# Altium PCB MainBay_v2.2_PCB.PcbDoc
Units mm, origin at the board's own origin, x right, y up, seen from the top; angles counter-clockwise.
Board outline 70 x 130 mm, 2 copper layers (Top Layer, Bottom Layer); 55 components, 47 nets, 322 pads, 51 vias.
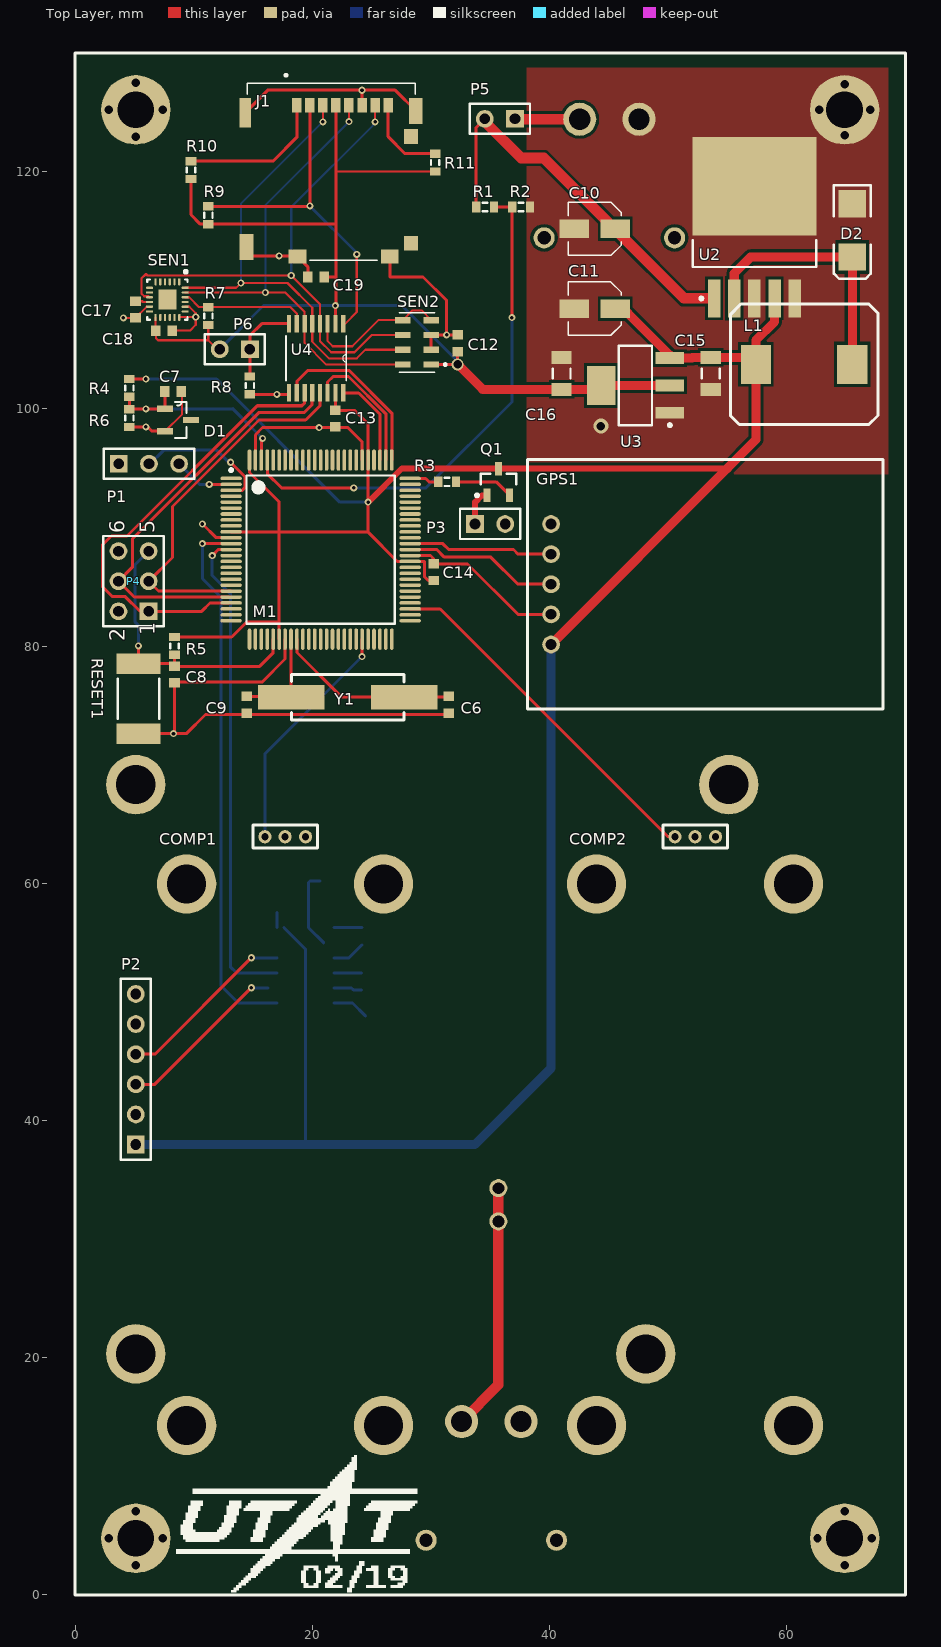
[diagram p0: Top Layer view]
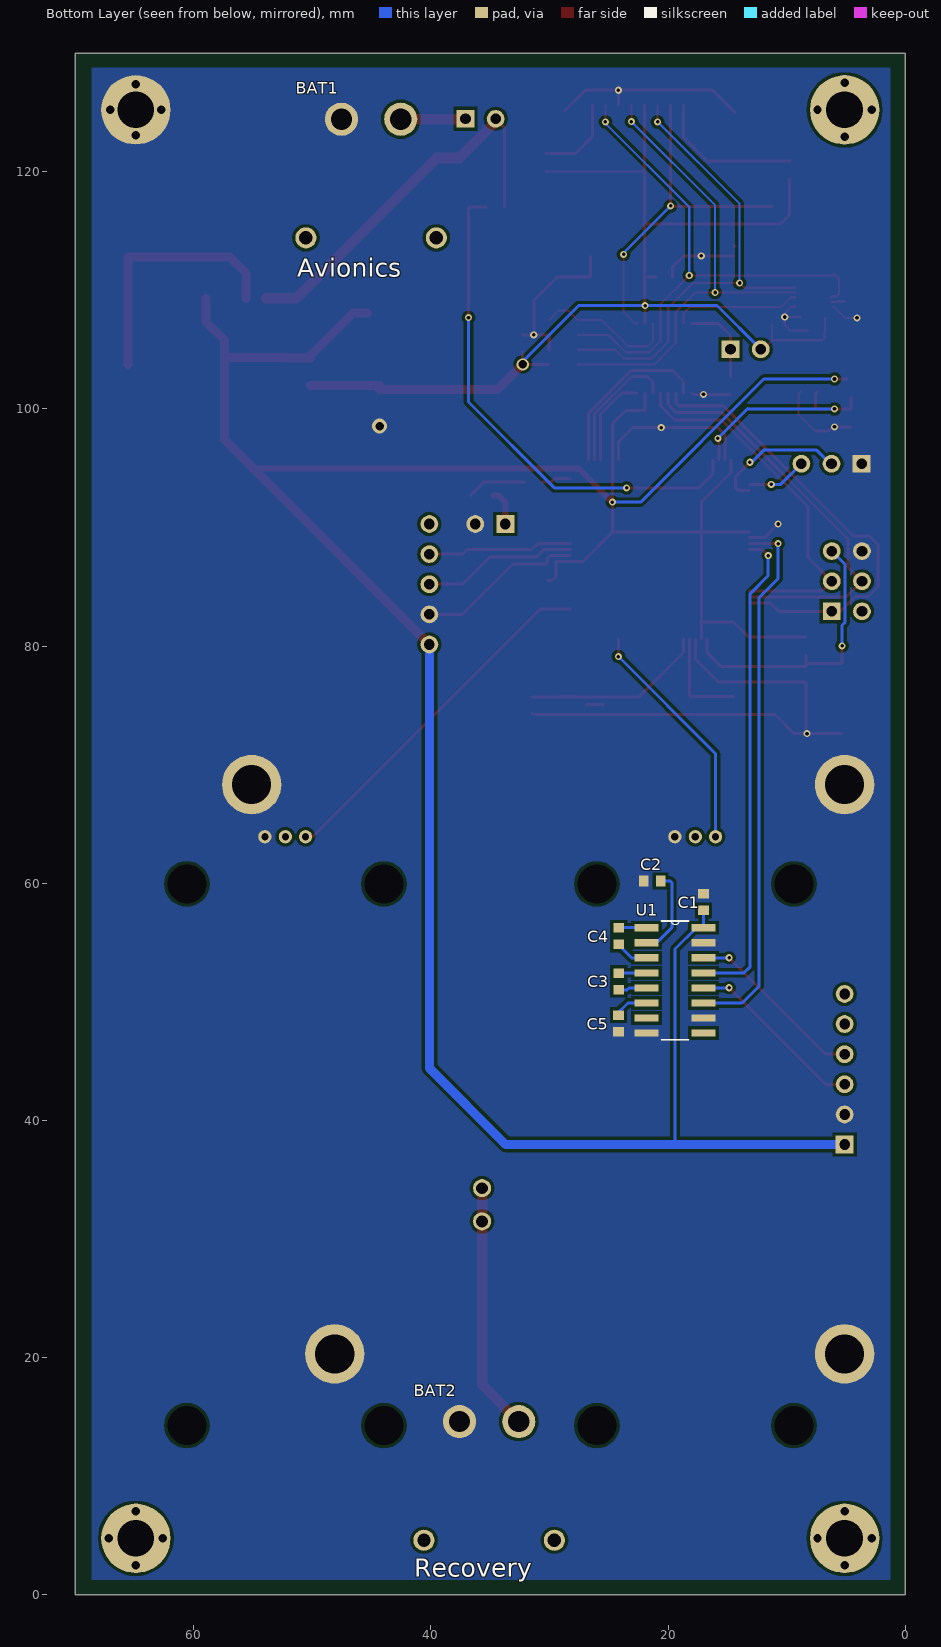
[diagram p1: Bottom Layer view, seen from below]

## Layer stack, top to bottom
Top Solder: solder mask 0.0102, Solder Resist, Dk 3.5
Top Layer: signal copper 0.0356
Dielectric 1: dielectric 0.32, FR-4, Dk 4.8
Bottom Layer: signal copper 0.0356
Bottom Solder: solder mask 0.0102, Solder Resist, Dk 3.5

## Board outline
0,0 0,130 70,130 70,0

## Design rules (kind name [scope] priority, off if disabled: settings)
Clearance [All] p1: gap=0.254 ignorepadtopadclearanceinfootprint=TRUE except(0: Arc-Hole Track-Hole SMDPad-Hole THPad-Hole Via-Hole Fill-Hole Poly-Hole Region-Hole Text-Hole; 0.127: Arc-Arc Arc-Track Arc-SMDPad Arc-Via Track-Track Track-SMDPad Track-Via SMDPad-SMDPad SMDPad-Via)
PlaneConnect [All] p1: planeconnectstyle=Direct reliefexpansion=0.508 reliefentries=4 reliefconductorwidth=0.254 reliefairgap=0.254
PolygonConnect [All] p1: connectstyle=Direct reliefconductorwidth=0.254 reliefentries=4 polygonreliefangle="90 Angle" airgapwidth=0.254
RoutingVias [All] p1: holewidth=0.3 width=0.6 viastyle="Through Hole" minholewidth=0.3 minwidth=0.6 maxholewidth=0.711 maxwidth=1.27
SolderMaskExpansion [All] p1: expansion=0.102
Width NetD2_2 [InNet('NetD2_2')] p1: maxlimit=0.762 minlimit=0.254 preferedwidth=0.762 minimp=50.000000 maximp=50.000000 favimp=50.000000
Width Battery [InNet('NetBAT1_1')] p2: maxlimit=1.016 minlimit=0.254 preferedwidth=0.889 bottomlayer_maxwidth=0.254 bottomlayer_prefwidth=0.254 minimp=50.000000 maximp=50.000000 favimp=50.000000
Width VREC [InNet('VREC')] p3: maxlimit=0.889 minlimit=0.508 preferedwidth=0.889 minimp=50.000000 maximp=50.000000 favimp=50.000000
Width Test [InNet('NetSEN1_24')] p4: maxlimit=0.254 minlimit=0.127 preferedwidth=0.178 minimp=50.000000 maximp=50.000000 favimp=50.000000
Width Diode [InNet('NetD1_2')] p5: maxlimit=0.889 minlimit=0.635 preferedwidth=0.762 minimp=50.000000 maximp=50.000000 favimp=50.000000
Width 3.3VDC [InNet('+3.3VDC')] p6: maxlimit=0.889 minlimit=0.178 preferedwidth=0.762 minimp=50.000000 maximp=50.000000 favimp=50.000000
Width 5VDC [InNet('+5VDC')] p7: maxlimit=0.889 minlimit=0.178 preferedwidth=0.762 minimp=50.000000 maximp=50.000000 favimp=50.000000
Width VBAT [InNet('VBAT')] p8: maxlimit=1.27 minlimit=0.254 preferedwidth=1.143 bottomlayer_minwidth=0.889 minimp=50.000000 maximp=50.000000 favimp=50.000000 // Battery trace width
Width [All] p9: maxlimit=0.508 minlimit=0.178 preferedwidth=0.254 minimp=50.000000 maximp=50.000000 favimp=50.000000
29 further rules are at their usual default settings.

## Classes and differential pairs
component class Sensors: C17 C18 C19 IMU J1 P6 PRES R7 R8 R9 R10 R11 SEN1 SEN2 U4
component class PowerSys: BAT1 BAT2 C10 C11 C12 C13 C14 C15 C16 D2 L1 P5 U2 U3
component class Microcontroller: C1 C2 C3 C4 C5 C6 C7 C8 C9 COMP1 COMP2 D1 GPS1 M1 P1 P2 P3 P4 Q1 R1 R2 R3 R4 R5 R6 RESET1 U1 Y1

## Components (designator, comment, footprint, x,y, rotation, side; value= is the part's Value field where it differs from the comment)
BAT1 "Avionics" XT30 42.546,124.427 r0 bottom
BAT2 "Recovery" XT30 32.592,14.605 r0 bottom
C1 "Cap Semi" 1608[0603] 17.018,58.415 r90 bottom value=1uF
C2 "Cap Semi" 1608[0603] 21.336,60.193 r0 bottom value=1uF
C3 "Cap Semi" 1608[0603] 24.168,51.735 r270 bottom value=1uF
C4 "Cap Semi" 1608[0603] 24.168,55.54 r270 bottom value=1uF
C5 "Cap Semi" 1608[0603] 24.188,48.174 r270 bottom value=1uF
C6 "Cap Semi" 1608[0603] 31.496,75.057 r90 top value=22pF
C7 "Cap Semi" 1608[0603] 8.256,101.473 r180 top value=0.1uF
C8 "Cap Semi" 1608[0603] 8.382,77.597 r90 top value=0.1uF
C9 "Cap Semi" 1608[0603] 14.478,75.057 r90 top value=22pF
C10 "Cap2" *CAPAE430X550N 43.815,115.189 r180 top value=680uF
C11 "Cap2" *CAPAE430X550N 43.815,108.458 r180 top value=10uF
C12 "Cap Semi" 1608[0603] 32.258,105.537 r270 top value=1uF
C13 "Cap Semi" 1608[0603] 21.946,99.187 r90 top value=1uF
C14 "Cap Semi" 1608[0603] 30.226,86.233 r270 top value=1uF
C15 "Cap Semi" C1206 53.594,102.997 r90 top value=1uF
C16 "Cap Semi" C1206 41.021,102.997 r270 top value=100pF
C17 "Cap Semi" 1608[0603] 5.088,108.382 r90 top value=1uF
C18 "Cap Semi" 1608[0603] 7.501,106.604 r180 top value=0.1uF
C19 "Cap Semi" 1608[0603] 20.32,111.125 r0 top value=0.1uF
COMP1 "StratoLogger_Standoff" StratoLogger_S 9.398,59.944 r270 top
COMP2 "StratoLogger_Standoff" StratoLogger_S 43.969,59.944 r270 top
D1 "LM4040A82IDBZR" SOT95P237X112-3N 8.671,99.06 r0 top
D2 "D Schottky" SMB 65.532,115.062 r270 top
GPS1 "Neo 6M GPS" "Neo 6M GPS" 40.132,80.137 r90 top
J1 "503182-1852" MOLEX_503182-1852_503182-1852(Primary) 21.59,119.253 r0 top
L1 "33uH" Inductor 61.468,103.759 r0 top
M1 "ATmega2560-16AU" 100A_N 20.701,88.138 r0 top
P1 "Header 3" HDR1X3 3.683,95.377 r0 top
P2 "Radio" HDR1X6 5.115,37.97 r90 top
P3 "Header 2" HDR1X2 33.721,90.297 r0 top
P4 "Header 3X2" HDR2X3 6.195,82.931 r90 top
P5 "RBF Switch Connector" HDR1X2 37.084,124.46 r180 top
P6 "Header 2" HDR1X2 14.732,105.029 r180 top
Q1 "PNP" SOT-23B_N 35.687,93.841 r90 top
R1 "Res3" J1-0603 34.563,117.022 r180 top value=20K
R2 "Res3" J1-0603 37.611,117.022 r180 top value=10K
R3 "Res3" J1-0603 31.369,93.853 r180 top value=10K
R4 "Res3" J1-0603 4.572,101.774 r90 top value=750
R5 "Res3" J1-0603 8.382,80.01 r270 top value=10K
R6 "Res3" J1-0603 4.572,99.234 r90 top value=10K
R7 "Res3" J1-0603 11.227,107.823 r90 top value=10K
R8 "Res3" J1-0603 14.732,101.981 r270 top value=100K
R9 "Res3" J1-0603 11.227,116.332 r90 top value=100K
R10 "Res3" J1-0603 9.763,120.142 r270 top value=10K
R11 "Res3" J1-0603 30.353,120.777 r270 top value=100K
RESET1 "KSS221GLFS" KSS-2G 5.334,75.565 r270 top
SEN1 "MPU-9250" QFN40P300X300X105_HS-25L 7.779,109.217 r270 top
SEN2 "MS561101" SON125P500X300X100-8N 28.829,105.613 r180 top
U1 "MAX232DR" SOIC127P600X175-16N 17.018,47.366 r180 bottom
U2 "LM2592HVS-5.0/NOPB" TS5B_N 57.277,115.316 r90 top
U3 "LD1117S33TR" SOT-223_N 47.244,101.981 r180 top
U4 "TXB0106" SOP65P640X120-16N 20.32,104.267 r270 top
Y1 "Crystal SMD" "Crystal SMD" 22.987,75.692 r180 top

## Footprints (in the part's own frame and the unit in brackets; to place one, negate y for a bottom-side part, rotate by r counter-clockwise, add the part's x,y. Pads: shape width x height; smd on the part's side, far side on the other; paste and mask are expansions set on the pad)
100A_N [mm] "Thin QFP, 100-Leads, Body 14x14mm, Pitch 0.5mm, IPC Medium Density"
  oval 1.8x0.3 smd: 1(-7.55,6) 2(-7.55,5.5) 3(-7.55,5) 4(-7.55,4.5) 5(-7.55,4) 6(-7.55,3.5) 7(-7.55,3) 8(-7.55,2.5) 9(-7.55,2) 10(-7.55,1.5) 11(-7.55,1) 12(-7.55,0.5) 13(-7.55,0) 14(-7.55,-0.5) 15(-7.55,-1) 16(-7.55,-1.5) 17(-7.55,-2) 18(-7.55,-2.5) 19(-7.55,-3) 20(-7.55,-3.5) 21(-7.55,-4) 22(-7.55,-4.5) 23(-7.55,-5) 24(-7.55,-5.5) 25(-7.55,-6) 51(7.55,-6) 52(7.55,-5.5) 53(7.55,-5) 54(7.55,-4.5) 55(7.55,-4) 56(7.55,-3.5) 57(7.55,-3) 58(7.55,-2.5) 59(7.55,-2) 60(7.55,-1.5) 61(7.55,-1) 62(7.55,-0.5) 63(7.55,0) 64(7.55,0.5) 65(7.55,1) 66(7.55,1.5) 67(7.55,2) 68(7.55,2.5) 69(7.55,3) 70(7.55,3.5) 71(7.55,4) 72(7.55,4.5) 73(7.55,5) 74(7.55,5.5) 75(7.55,6)
  oval 0.3x1.8 smd: 26(-6,-7.55) 27(-5.5,-7.55) 28(-5,-7.55) 29(-4.5,-7.55) 30(-4,-7.55) 31(-3.5,-7.55) 32(-3,-7.55) 33(-2.5,-7.55) 34(-2,-7.55) 35(-1.5,-7.55) 36(-1,-7.55) 37(-0.5,-7.55) 38(0,-7.55) 39(0.5,-7.55) 40(1,-7.55) 41(1.5,-7.55) 42(2,-7.55) 43(2.5,-7.55) 44(3,-7.55) 45(3.5,-7.55) 46(4,-7.55) 47(4.5,-7.55) 48(5,-7.55) 49(5.5,-7.55) 50(6,-7.55) 76(6,7.55) 77(5.5,7.55) 78(5,7.55) 79(4.5,7.55) 80(4,7.55) 81(3.5,7.55) 82(3,7.55) 83(2.5,7.55) 84(2,7.55) 85(1.5,7.55) 86(1,7.55) 87(0.5,7.55) 88(0,7.55) 89(-0.5,7.55) 90(-1,7.55) 91(-1.5,7.55) 92(-2,7.55) 93(-2.5,7.55) 94(-3,7.55) 95(-3.5,7.55) 96(-4,7.55) 97(-4.5,7.55) 98(-5,7.55) 99(-5.5,7.55) 100(-6,7.55)
  silkscreen extent -7.67,-6.25 6.25,6.82, body extent -7,-7 7,7, height 1.2
1608[0603] [mm] "Chip Capacitor, Body 1.6x0.8mm, IPC High Density"
  rect 0.8x0.9 smd: 1(-0.7,0) 2(0.7,0)
  body extent -0.87,-0.48 0.87,0.48, height 1.3
*CAPAE430X550N [mm]
  rect 2.46x1.58 smd: 1(-1.725,0) 2(1.725,0)
  silkscreen extent -2.25,-2.25 2.25,2.25
C1206 [mm] "Chip Capacitor, Body 3.2x1.6mm, IPC High Density"
  rect 1.1x1.7 smd: 1(-1.35,0) 2(1.35,0)
  silkscreen extent -0.4,-0.75 0.4,0.75, body extent -1.7,-0.9 1.7,0.9, height 1.3
"Crystal SMD" [mil]
  rect 220x80 smd: 1(-187.5,0) 2(187.5,0)
  silkscreen extent -188,-75 188,75
HDR1X2 [mm] "Connector; Header; 2 Position"
  rect 1.5x1.5 hole 0.9: 1(0,0)
  round 1.5 hole 0.9: 2(2.54,0)
  silkscreen extent -1.27,-1.27 3.81,1.27
HDR1X3 [mm] "Connector; Header; 3 Position"
  rect 1.5x1.5 hole 0.9: 1(0,0)
  round 1.5 hole 0.9: 2(2.54,0) 3(5.08,0)
  silkscreen extent -1.27,-1.27 6.35,1.27
HDR1X6 [mm] "Connector; Header; 6 Position"
  rect 1.5x1.5 hole 0.9: 1(0,0)
  round 1.5 hole 0.9: 2(2.54,0) 3(5.08,0) 4(7.62,0) 5(10.16,0) 6(12.7,0)
  silkscreen extent -1.27,-1.27 13.97,1.27
HDR2X3 [mm] "Connector; Header; 3x2 Position"
  rect 1.5x1.5 hole 0.9: 1(0,0)
  round 1.5 hole 0.9: 2(0,2.54) 3(2.54,0) 4(2.54,2.54) 5(5.08,0) 6(5.08,2.54)
  silkscreen extent -1.27,-1.27 6.35,3.81
Inductor [mil]
  rect 100x130 smd: 1(-160,0) 2(160,0)
  silkscreen extent -245,-200 245,200
J1-0603 [mm] "Chip Resistor, Body 1.6x0.8mm, IPC High Density"
  rect 0.7x0.9 smd: 1(-0.75,0) 2(0.75,0)
  silkscreen extent -0.2,-0.35 0.2,0.35, body extent -0.85,-0.48 0.85,0.48, height 0.9
KSS-2G [mm] "Switch, Side Tact, SM; 2 Leads; Body 7x3.5mm (LxW)"
  rect 1.7x3.7 smd: 1(2.95,0) 2(-2.95,0)
  silkscreen extent -1.7,-1.75 1.7,1.75, body extent -2.75,-2.65 2.75,1.75, height 1.75
MOLEX_503182-1852_503182-1852(Primary) [mm]
  rect 0.8x1.24 smd: 1(-2.9,6.355) 2(-1.8,6.355) 3(-0.7,6.355) 4(0.4,6.355) 5(1.5,6.355) 6(2.6,6.355) 7(3.7,6.355) 8(4.8,6.355)
  rect 1.16x1.2 smd: DT(6.74,-5.275)
  rect 0.95x2.5 smd: P1(-7.245,5.725)
  rect 1.15x2.2 smd: P2(7.145,5.875) P3(-7.145,-5.605)
  rect 1.5x1.15 smd: P4(-2.84,-6.4) P5(4.94,-6.4)
  rect 1.16x1.25 smd: SW(6.74,3.725)
  silkscreen extent -7.07,-6.73 7.07,8.99
"Neo 6M GPS" [mm]
  round 1.5 hole 0.9: 1(0,0) 2(2.54,0) 3(5.08,0) 4(7.62,0) 5(10.16,0)
  silkscreen extent -5.42,-28 15.58,2
QFN40P300X300X105_HS-25L [mm] "QFN, 24-Leads, Body 3.00x3.00mm, Pitch 0.40mm, Thermal Pad 1.70x1.54mm, IPC High Density"
  oval 0.6x0.2 smd: 1(-1.5,1) 2(-1.5,0.6) 3(-1.5,0.2) 4(-1.5,-0.2) 5(-1.5,-0.6) 6(-1.5,-1) 13(1.5,-1) 14(1.5,-0.6) 15(1.5,-0.2) 16(1.5,0.2) 17(1.5,0.6) 18(1.5,1)
  oval 0.2x0.6 smd: 7(-1,-1.5) 8(-0.6,-1.5) 9(-0.2,-1.5) 10(0.2,-1.5) 11(0.6,-1.5) 12(1,-1.5) 19(1,1.5) 20(0.6,1.5) 21(0.2,1.5) 22(-0.2,1.5) 23(-0.6,1.5) 24(-1,1.5)
  rect 1.7x1.54 smd: 25(0,0)
  silkscreen extent -2.47,-1.7 1.7,1.7, body extent -1.55,-1.55 1.55,1.55, height 1.05
SMB [mm] "DO-214-AA/SMB; 2 C-Bend Leads; Body 5.3 x 3.6 mm, inc. leads (LxW)"
  rect 2.3x2.3 smd: 1(-2.25,0) 2(2.25,0)
  silkscreen extent -3.8,-1.55 4.1,1.55
SOIC127P600X175-16N [mil]
  rect 81x24 smd: 1(-189,350) 2(-189,300) 3(-189,250) 4(-189,200) 5(-189,150) 6(-189,100) 7(-189,50) 8(-189,0) 9(0,0) 10(0,50) 11(0,100) 12(0,150) 13(0,200) 14(0,250) 15(0,300) 16(0,350)
  silkscreen extent -140,-22 -49,372
SON125P500X300X100-8N [mm]
  rect 1.31x0.53 smd: 1(-1.2,1.875) 2(-1.2,0.625) 3(-1.2,-0.625) 4(-1.2,-1.875) 5(1.2,-1.875) 6(1.2,-0.625) 7(1.2,0.625) 8(1.2,1.875)
  silkscreen extent -2.48,-2.5 1.5,2.5
SOP65P640X120-16N [mil]
  rect 58x14 smd: 1(-115,90) 2(-115,64) 3(-115,38) 4(-115,13) 5(-115,-13) 6(-115,-38) 7(-115,-64) 8(-115,-90) 9(115,-90) 10(115,-64) 11(115,-38) 12(115,-13) 13(115,13) 14(115,38) 15(115,64) 16(115,90)
  silkscreen extent -74,-100 74,100
SOT95P237X112-3N [mil]
  rect 52x22 smd: 1(-43,37) 2(-43,-37)
  rect 52x20 smd: 3(43,0)
  silkscreen extent -11,-60 28,60
SOT-23B_N [mm] "SOT23, 3-Leads, Body 2.9x1.3mm, Pitch 0.95mm, Lead Span 2.4mm, IPC Medium Density"
  rect 1.15x0.6 smd: 1(-1.125,0.95) 2(-1.125,-0.95) 3(1.125,0)
  silkscreen extent -1.25,-1.5 0.7,1.92, body extent -0.7,-1.5 0.7,1.5, height 1.14
SOT-223_N [mm] "SOT223, 4-Leads, Body 6.5x3.5mm, Pitch 2.3mm, Lead Span 7mm, IPC Medium Density"
  rect 2.4x1 smd: 1(-2.9,2.3) 2(-2.9,0) 3(-2.9,-2.3)
  rect 2.4x3.3 smd: 4(2.9,0)
  silkscreen extent -3.03,-3.35 1.4,3.47, body extent -1.85,-3.35 1.85,3.35, height 1.8
StratoLogger_S [mm] "Flight computer mounted on M3 standoffs"
  round 1.118 hole 0.61: 1(-3.987,6.604) 2(-3.987,8.305) 3(-3.987,10.033)
  round 5 / inner round 1.524 / far side round 1.524 hole 3.3: Mount(0,16.61) Mount(0,0) Mount(45.67,16.61) Mount(45.67,0)
  silkscreen extent -4.95,5.59 -3.05,11.05
TS5B_N [mm] "D2-PAK, 6-Leads, Body 8.6x10.2mm, Pitch 1.7mm, Lead Span 14.1mm, IPC Medium Density"
  rect 3.2x1.05 smd: 1(-6,3.4) 2(-6,1.7) 3(-6,0) 4(-6,-1.7) 5(-6,-3.4)
  rect 8.3x10.45 smd: 6(3.45,0)
  silkscreen extent -6.12,-5.2 -1.1,5.2, body extent -3.35,-5.2 6.05,5.2, height 4.65
XT30 [mil]
  round 110 hole 70: 1(0,0) 2(196.85,0)
  round 70 hole 44: ""(-118.11,393.7) ""(314.96,393.7)

## Part data
BAT1 BAT2: library part XT30
C1 C2 C3 C4 C5 C6 C7 C8 C9 C12 C13 C14 C15 C16 C17 C18 C19: "Capacitor (Semiconductor SIM Model)", LatestRevisionDate=29-May-2009, LatestRevisionNote="IPC-7351 Footprint Added.", PackageDescription="Chip Capacitor", PackageReference=C1206, Published=8-Jun-2000, Publisher="Altium Limited"
C10 C11: "Capacitor", PackageDescription="Capacitor; 2 Leads", PackageReference=CAPR5-4X5, Published=23-Sep-2002, Publisher="Altium Limited"
D1: "Precision Micropower Shunt Voltage Reference, 0.1% accuracy 3-SOT-23 -40 to 85", Package="SOT-23-3 Texas Instruments", Availability=Unavailable, MF="Texas Instruments", MP=LM4040A82IDBZR, Price=None, SnapEDA_Link=https://www.snapeda.com/parts/LM4040A82IDBZR/Texas%20Instruments/view-part/?ref=snap
D2: "Schottky Diode", Code_JEDEC=DO-214-AA, LatestRevisionDate=17-Jul-2002, LatestRevisionNote="Re-released for DXP Platform.", PackageDescription="DO-214-AA/SMB; 2 C-Bend Leads; Body 5.3 x 3.6 mm, inc. leads (LxW)", PackageReference=SMB, Published=8-Jun-2000, Publisher="Altium Limited"
J1: library part "microSD Slot", "Conn Micro SD Card M 8 POS 1.09mm Solder RA SMD Embossed T/R 0.5A/Contact", Package=None, Availability=Unavailable, MF=Molex, MP=503182-1852, Price=None, SnapEDA_Link=https://www.snapeda.com/parts/503182-1852/Molex/view-part/?ref=snap
L1: library part Inductor
M1: "8-bit AVR Microcontroller, 4.5-5.5V, 256KB Flash, 4KB EEPROM, 8KB SRAM, 86 GPIO pins, 100-pin TQFP, Industrial Grade (-40°C to 85°C), Pb-Free", Supplier Part Number 1=ATMEGA2560-16AU-ND, Code_JEDEC=MS-026-AED, ComponentLink1Description="Manufacturer Link", ComponentLink1URL=http://www.atmel.com/products/avr/default.asp?, ComponentLink2Description="ATmega640/1280/1281/2560/2561 Datasheet", ComponentLink2URL=http://www.atmel.com/dyn/resources/prod_documents/doc2549.pdf, ComponentLink3Description="ATmega640/1280/1281/2560/2561 Summary", ComponentLink3URL=http://www.atmel.com/dyn/resources/prod_documents/2549S.pdf, ComponentLink4Description="Atmel.com Home", ComponentLink4URL=http://www.atmel.com, DatasheetVersion="revL, Aug-2007", PackageDescription="100-Pin Thin Profile Plastic Quad Flat Pack (TQFP), 14 x 14 x 1.0 mm Body, 0.5 mm Pitch", PackageReference=100A, PackageVersion="revC, Oct-2001", Published=1-Apr-2010, Publisher="Altium Limited", Supplier 1=Digi-Key, Supplier 2=Farnell, Supplier 3=Farnell, Supplier 4=Mouser, Supplier Part Number 2=1288330, Supplier Part Number 3=1661740, Supplier Part Number 4=556-ATMEGA2560-16AU
P1: "Header, 3-Pin", LatestRevisionDate=17-Jul-2002, LatestRevisionNote="Re-released for DXP Platform.", Publisher="Altium Limited"
P2: library part "Header 6", "Header, 6-Pin", LatestRevisionDate=17-Jul-2002, LatestRevisionNote="Re-released for DXP Platform.", Publisher="Altium Limited"
P3 P6: "Header, 2-Pin", LatestRevisionDate=17-Jul-2002, LatestRevisionNote="Re-released for DXP Platform.", Publisher="Altium Limited"
P4: "Header, 3-Pin, Dual row", LatestRevisionDate=17-Jul-2002, LatestRevisionNote="Re-released for DXP Platform.", Publisher="Altium Limited"
P5: library part "Header 2", "Header, 2-Pin", LatestRevisionDate=17-Jul-2002, LatestRevisionNote="Re-released for DXP Platform.", Publisher="Altium Limited"
Q1: "PNP Bipolar Transistor", LatestRevisionDate=29-May-2009, LatestRevisionNote="IPC-7351 Footprint Added.", PackageDescription="3-Pin SOT-23 Package 0.95 mm Pitch, 2.4 mm Lead Span", PackageReference=SOT-23B, PackageVersion=Aug-1999, Published=8-Jun-2000, Publisher="Altium Limited"
R1 R2 R3 R4 R5 R6 R7 R8 R9 R10 R11: "Resistor", LatestRevisionDate=29-May-2009, LatestRevisionNote="IPC-7351 Footprint Added.", PackageDescription="Chip Resistor", PackageReference=J1-0603, Published=8-Jun-2000, Publisher="Altium Limited"
RESET1: "Switch, Subminiature Side-Actuated Tact, SMT, KSS Series, Std Actuator, 2 Gull Wing Leads, SPST, 2N Force, Silver Contact", ComponentLink1Description="Manufacturer Link", ComponentLink1URL=http://www.ck-components.com/, ComponentLink2Description=Datasheet, ComponentLink2URL=http://www.ck-components.com/media/pdf/catalogs/Tactile_Switches%5CKSS_series_Tactile_August_2007.pdf, DatasheetVersion=Aug-2007, PackageDescription="Subminiature SMT Side Actuated Switch, Body 7 x 3.5 mm (LxW)", PackageReference=KSS-2G, PackageVersion=Aug-2007, PCB_Layout="Complies with manufacturer's recommendation.", Published=14-Mar-2008, Publisher="Altium Limited"
SEN2: library part MS561101BA03-50, "Pressure Sensor 1.44V to 3.6V 0.01bar to 1.2bar Absolute 8-Pin QFN T/R", Package="SMD-8 Measurement Specialties", Availability=Unavailable, MF="TE Connectivity", MP=MS561101BA03-50, Price=None, SnapEDA_Link=https://www.snapeda.com/parts/MS561101BA03-50/TE%20Connectivity%20ALCOSWITCH%20Switches/view-part/?ref=snap, TE_purchase_URL=https://www.te.com/usa-en/product-MS561101BA03-50.html?te_bu=Cor&te_type=disp&te_campaign=seda_glo_cor-seda-global-disp-prtnr-fy19-seda-model-bom-cta_sma-317_1&elqCampaignId=32493
U1: "Single Supply Voltage, RS-232 Transceiver", Package="SOIC-16 Chipswinner", Availability=Unavailable, MF="Texas Instruments", MP=MAX232DR, Price=None, SnapEDA_Link=https://www.snapeda.com/parts/MAX232DR/Texas%20Instruments/view-part/?ref=snap
U2: "SIMPLE SWITCHER® Power Converter 150 KHz 2A Step-Down Voltage Regulator, 5-pin TO-263, Pb-Free", Manufacturer="National Semiconductor", PackageTopMarking="NSUZXYTTE#*LM2592HVS*-5.0 P+", PowerWise=N, Supplier Part Number 1=LM2592HVS-5.0-ND, Code_JEDEC=MO-169-AB, ComponentLink1Description="LM2592HV Datasheet", ComponentLink1URL=http://www.national.com/ds/LM/LM2592HV.pdf, ComponentLink2Description="LM2592HV Web Page", ComponentLink2URL=http://www.national.com/pf/LM/LM2592HV.html, ComponentLink3Description="TS5B Package Page", ComponentLink3URL=http://www.national.com/packaging/folders/ts5b.html, CompType=Switcher, DatasheetVersion=Aug-2001, PackageDescription="TO-263, Molded, .400 x .390 x .180in, 5 Lead, .067in Pitch, Surface Mount", PackageReference=TS5B, PackageVersion="revD, Apr-2005", PartNumber=LM2592HVS-5.0/NOPB, PinCount=5, Published=1-Mar-2010, Publisher="Altium Limited", RoHS=Y, Supplier 1=Digi-Key, Supplier 2=Farnell, Supplier Part Number 2=1469187
U3: "Fixed Low Drop Positive Voltage Regulator, 3.3V, 4-Pin SOT-223, Tape and Reel", ComponentLink1Description="Manufacturer URL", ComponentLink1URL=http://www.st.com, ComponentLink2Description=Datasheet, ComponentLink2URL=http://www.st.com/internet/com/TECHNICAL_RESOURCES/TECHNICAL_LITERATURE/DATASHEET/CD00000544.pdf, DatasheetVersion=Nov-2011, PackageDescription="4-Pin SOT-223 Package, 6.5 x 3.5 mm Body, 2.3 mm Pitch, 7 mm Lead Span", PackageReference=SOT-223, PackageVersion=2010, PartNumber=LD1117S33TR
U4: library part TXB0106PWR, "6-Bit Bidirectional Voltage-Level Translator with Auto Direction Sensing and +/-15-kV ESD Protect 16-TSSOP -40 to 85", Package="TSSOP-16 Texas Instruments", Availability=Unavailable, MF="Texas Instruments", MP=TXB0106PWR, Price=None, SnapEDA_Link=https://www.snapeda.com/parts/TXB0106PWR/Texas%20Instruments/view-part/?ref=snap

## Free pads (board coordinates)
  round 5.842 hole 3.1: Mount(5.115,4.766) Mount(5.115,125.222) Mount(64.885,4.766) Mount(64.885,125.222)
  round 5.004 hole 3.302: ""(5.115,20.32) ""(5.115,68.32) ""(48.115,20.32) ""(55.115,68.32)
  round 1.524 hole 1: ""(35.687,31.496) ""(35.687,34.29)

## Via types
v1: diameter 0.6, hole 0.3, Top Layer to Bottom Layer, tented both sides, 33 vias
v2: diameter 1.27, hole 0.711, Top Layer to Bottom Layer, 17 vias
v3: diameter 1.016, hole 0.711, Top Layer to Bottom Layer, 1 vias

## Nets (pads, with @x,y where several pads share a name; then routed paths per layer and width w, separated by ;. In a path a pad name is that pad's centre, name@x,y a point inside that pad or via, vN(x,y) a via of type N, cw(c..) or ccw(c..) an arc to the next point about the centre after c; other vN are vias at no path point)
+3.3VDC: C12.2 C16.2 C18.2 C19.2 J1.4 P6.2 R7.1 R9.1 R10.2 R11.2 SEN1.13 SEN2.1 U3.2 U3.4 U4.2 | length 98.5
  Top Layer w0.178: C18.2@6.771,106.472 SEN1.13@6.771,107.712 ; C18.2 6.801,105.975 6.985,105.791 11.227,105.791 ; R7.1 11.227,105.791 ; P6.2 11.989,105.029 11.227,105.791 ; 21.99,120.015 22.002,120.027 R11.2 ; v3@32.237,103.738 v3(32.258,103.759)
  Top Layer w0.254: R10.2 9.763,116.377 10.558,115.582 R9.1 21.978,115.582 21.99,115.57 ; C19.2 21.99,111.125 ; U4.2 v1(21.946,108.712) 21.99,108.756 21.99,111.125 ; J1.4 21.99,120.015 21.99,115.57 ; SEN2.1 v3@32.237,103.738 ; v3(32.258,103.759) C12.2 ; 21.99,111.125 21.99,115.57
  Top Layer w0.762: v3(32.258,103.759) 34.37,101.647 C16.2 U3.4@44.344,101.647 ; U3.4@44.344,101.625 U3.4@44.344,101.647 ; U3.2 U3.4 U3.4@44.344,101.647
  Bottom Layer w0.254: P6.2 15.875,108.712 v1(21.946,108.712) 27.537,108.712 32.258,103.991 v3(32.258,103.759)
+5VDC: C1.1 C11.1 C13.2 C14.2 C15.2 GPS1.1 L1.1 M1.10 M1.31 M1.61 M1.80 M1.100 P2.1 Q1.3 R4.2 R5.1 U1.16 U2.4 U3.3 U4.15 | length 258.9
  Top Layer w0.254: R4.2@4.93,102.524 v1(5.969,102.524) ; R5.1 13.196,80.76 14.478,82.042 17.201,82.042 ; M1.10 17.201,89.638 ; M1.100 14.701,94.646 17.201,92.146 17.201,89.638 ; M1.31 17.201,82.042 ; C13.2 C13.2@22.033,99.887 ; U4.15 21.946,99.974 C13.2@22.033,99.887 ; C14.2 29.783,85.533 29.448,85.868 29.448,87.138 M1.61 27.17,87.138 24.67,89.638 ; 17.201,82.042 17.201,89.638 ; 17.201,89.638 24.67,89.638 ; C13.2@22.033,99.887 23.557,99.887 24.701,98.743 M1.80 v1(24.701,92.138) 24.701,89.669 24.67,89.638
  Top Layer w0.508: v1(24.701,92.138) 27.559,94.996 54.991,94.996
  Top Layer w0.762: GPS1.1 54.991,94.996 57.404,97.409 L1.1 L1.1@57.404,104.347 ; C11.1@45.339,108.077 46.609,108.077 50.144,104.542 U3.3 52.004,104.281 52.07,104.347 C15.2 L1.1@57.404,104.347 ; U2.4 58.977,107.364 57.404,105.791 L1.1@57.404,104.347
  Bottom Layer w0.254: v1(5.969,102.524) 11.929,102.524 22.315,92.138 v1(24.701,92.138) ; U1.16 C1.1@17.018,57.526 ; U1.16@17.614,56.256 19.41,54.46 19.41,37.984 19.397,37.97
  Bottom Layer w0.762: P2.1 19.397,37.97 33.678,37.97 40.132,44.424 GPS1.1
COMP2_RX: COMP2.1 M1.53 | length 30.3
  Top Layer w0.254: M1.53 30.781,83.138 49.988,63.931 COMP2.1
CS_IMU: M1.77 U4.14 | length 11.2
  Top Layer w0.254: U4.14 21.285,102.273 21.755,102.743 23.054,102.743 26.201,99.596 M1.77
CS_PRES: M1.76 U4.10 | length 14.8
  Top Layer w0.254: U4.10 18.694,102.31 19.635,103.251 23.097,103.251 26.701,99.647 M1.76
CS_SD: M1.78 U4.16 | length 7.7
  Top Layer w0.254: U4.16 23.912,101.346 25.701,99.557 M1.78
GND: BAT1.2 BAT2.2 C1.2 C2.2 C5.2 C6.1 C7.1 C8.1 C9.1 C10.2 C11.2 C12.1 C13.1 C14.1 C15.1 C16.1 C17.1 C18.1 C19.1 COMP1.3 COMP2.3 D1.2 D2.1 GPS1.2 J1.6 J1.P1 J1.P2 J1.P3 J1.P4 J1.P5 M1.11 M1.32 M1.62 M1.81 M1.99 P1.1 P2.2 P3.2 P4.6 pad.@5.115,20.32 pad.@5.115,68.32 pad.@48.115,20.32 pad.@55.115,68.32 pad.Mount@64.885,125.222 R2.1 R6.1 R8.2 RESET1.1 SEN1.11 SEN1.18 SEN1.20 SEN2.2 SEN2.3 U1.8 U1.10 U1.15 U2.3 U2.5 U2.6 U3.1 U4.9 | length 129.3
  Top Layer w0.178: v1(4.072,107.682) C17.1 SEN1.11@6.023,108.617 ; D1.2 9.017,99.558 9.017,101.285 C7.1@8.829,101.473 ; C18.1 9.685,106.604 10.168,107.086 v1(10.168,107.754) ; SEN1.18@8.816,107.754 v1(10.168,107.754) ; SEN1.20 9.62,108.617 10.168,108.069 v1(10.168,107.754) ; v1@17.006,101.231 v1(17.018,101.219)
  Top Layer w0.254: R6.1 v1(5.969,98.484) 6.113,98.484 6.477,98.12 D1.2 ; RESET1.1 v1(8.291,72.615) 9.369,72.615 10.984,74.23 11.452,74.23 11.457,74.23 31.369,74.23 C6.1 ; v1@8.382,72.771 C8.1 8.447,76.962 15.748,76.962 17.701,78.915 M1.32 ; v1(10.73,90.297) 11.889,89.138 M1.11 ; J1.P3@14.345,113.748 J1.P3 ; J1.P1 16.24,126.873 v1(24.19,126.873) ; J1.P3@14.445,112.903 v1(17.201,112.903) 18.7,112.903 J1.P4 19.62,111.983 C19.1 ; R8.2 v1@17.006,101.231 ; M1.99 15.201,97.821 15.805,98.425 v1(20.574,98.425) 22.987,98.425 24.201,97.211 M1.81 ; v1(17.018,101.219) 17.907,101.219 U4.9 ; J1.6 v1(24.19,126.873) ; J1.P5 26.53,111.125 29.337,111.125 31.328,109.134 v1(31.328,106.238) ; M1.62 29.964,87.638 30.226,87.376 C14.1 33.082,86.933 37.338,82.677 GPS1.2 ; J1.P2 26.99,126.873 v1(24.19,126.873) ; SEN2.2 30.023,104.988 30.023,106.238 SEN2.3 v1(31.328,106.238) ; C12.1 C12.1 v1(31.328,106.238)
  other v2: 44.323,98.552 64.885,123.063 62.738,125.222 67.056,125.222 64.897,127.381
MISO: M1.22 P4.1 U4.11 | length 38.4
  Top Layer w0.254: M1.22 11.375,83.638 10.668,82.931 P4.1 5.461,82.931 4.191,84.201 3.104,84.201 2.286,85.019 2.286,88.519 3.048,89.281 4.369,89.281 15.356,100.268 19.114,100.268 19.355,100.509 U4.11
MOSI: M1.21 P4.4 U4.12 | length 34.9
  Top Layer w0.254: M1.21 4.988,84.138 P4.4 4.826,86.642 4.826,89.027 15.48,99.681 19.29,99.681 19.99,100.381 U4.12
NetBAT1_1: BAT1.1 P5.1 | length 5.5
  Top Layer w0.254: P5.1 P5.1@37.117,124.427
  Top Layer w0.889: P5.1@37.117,124.427 BAT1.1
NetC2_1: C2.1 U1.2 | length 6.6
  Bottom Layer w0.254: C2.1 19.812,60.193 19.685,60.066 19.685,56.256 U1.2@20.955,54.986
NetC3_1: C3.1 U1.4 | length 2.3
  Bottom Layer w0.254: U1.4 C3.1@24.13,52.446
NetC3_2: C3.2 U1.5 | length 2.4
  Bottom Layer w0.254: U1.5 23.303,51.176 23.46,51.02 C3.2@24.13,51.02
NetC4_1: C4.1 U1.1 | length 2.3
  Bottom Layer w0.254: U1.1 C4.1@24.168,56.256
NetC4_2: C4.2 U1.3 | length 2.8
  Bottom Layer w0.254: U1.3 23.083,53.716 C4.2@24.168,54.801
NetC5_1: C5.1 U1.6 | length 3.1
  Bottom Layer w0.254: U1.6 23.392,49.906 C5.1@24.47,48.828
NetC6_2: C6.2 M1.34 Y1.1 | length 18.4
  Top Layer w0.254: M1.34 18.701,79.47 22.479,75.692 Y1.1 31.431,75.692 C6.2 ; Y1.1@25.463,75.057 Y1.1@26.924,75.057 ; Y1.1@27.749,75.757 Y1.1@29.21,75.757
NetC7_2: C7.2 D1.1 M1.98 R4.1 R6.2 | length 18.6
  Top Layer w0.254: R4.1 4.572,100 v1(5.969,100) D1.1@7.407,100 ; C7.2@7.429,101.473 7.579,101.323 D1.1 ; M1.98 15.701,97.405 v1(15.805,97.509) ; D1.1@7.407,100 7.493,100.086 D1.1 ; D1.1@7.407,100 D1.1
  Bottom Layer w0.254: v1(5.969,100) 13.281,100 13.298,100.016 v1(15.805,97.509)
NetC8_2: C8.2 M1.30 P4.5 R5.2 RESET1.2 | length 24.1
  Top Layer w0.254: v1(5.334,80.022) RESET1.2 8.164,78.515 C8.2 ; R5.2 C8.2 ; M1.30 16.701,79.439 15.559,78.297 C8.2
  Bottom Layer w0.254: v1(5.334,80.022) 5.334,81.753 5.064,82.023 5.064,86.88 P4.5
NetC9_2: C9.2 M1.33 Y1.2 | length 8.5
  Top Layer w0.254: C9.2 18.159,75.757 18.201,75.799 M1.33
NetC17_2: C17.2 SEN1.10 | length 1.2
  Top Layer w0.178: C17.2 5.658,109.082 5.723,109.017 SEN1.10
NetCOMP1_1: COMP1.1 M1.45 | length 20.1
  Top Layer w0.254: v1(24.19,79.121) 24.201,79.132 M1.45
  Bottom Layer w0.254: COMP1.1 16.002,70.933 v1(24.19,79.121)
NetD2_2: D2.2 L1.2 U2.2 | length 21.7
  Top Layer w0.762: U2.2 55.577,111.433 56.956,112.812 D2.2 L1.2
NetGPS1_3: GPS1.3 M1.63 | length 13.1
  Top Layer w0.254: M1.63 30.491,88.138 31.126,87.503 35.052,87.503 37.338,85.217 GPS1.3
NetGPS1_4: GPS1.4 M1.64 | length 12.2
  Top Layer w0.254: M1.64 30.999,88.638 31.499,88.138 36.957,88.138 37.338,87.757 GPS1.4
NetJ1_1: J1.1 R10.1 | length 12.6
  Top Layer w0.254: R10.1@9.672,120.892 R10.1 16.682,120.892 18.69,122.9 J1.1
NetJ1_2: J1.2 R9.2 U4.1 | length 29.2
  Top Layer w0.178: U4.1 22.761,107.188 23.763,108.19 23.749,108.204 v1(23.749,113.03)
  Top Layer w0.254: R9.2 19.756,117.082 v1(19.79,117.116) J1.2
  Bottom Layer w0.254: v1(19.79,117.116) 23.763,113.143 23.749,113.129 v1(23.749,113.03)
NetJ1_3: J1.3 SEN1.24 SEN2.7 U4.5 | length 41
  Top Layer w0.178: SEN1.24 13.57,110.217 v1(13.97,110.617) 17.907,110.617 19.99,108.534 U4.5 19.99,105.675 21.398,104.267 23.749,104.267 24.47,104.988 SEN2.7 ; v1(20.89,124.206) J1.3
  Bottom Layer w0.178: v1(13.97,110.617) 13.97,117.286 v1(20.89,124.206)
NetJ1_5: J1.5 SEN1.23 SEN2.8 U4.6 | length 41.1
  Top Layer w0.178: SEN1.23 v1(16.036,109.817) 17.717,109.817 19.355,108.179 U4.6 19.355,105.569 21.185,103.738 SEN2.8 ; v1(23.09,124.23) J1.5
  Bottom Layer w0.178: v1(16.036,109.817) 16.036,117.176 v1(23.09,124.23)
NetJ1_7: J1.7 SEN1.9 SEN2.6 U4.4 | length 46.7
  Top Layer w0.178: SEN1.9 6.195,109.501 5.824,109.501 5.588,109.737 5.588,110.998 5.969,111.379 6.096,111.252 v1(18.219,111.252) 20.65,108.821 U4.4 20.65,105.715 21.59,104.775 23.56,104.775 25.023,106.238 SEN2.6 ; v1(25.29,124.206) J1.7
  Bottom Layer w0.178: v1(18.219,111.252) 18.219,117.025 25.29,124.096 v1(25.29,124.206)
NetJ1_8: J1.8 R11.1 | length 7.2
  Top Layer w0.254: J1.8 26.39,122.952 27.815,121.527 R11.1
NetM1_2: M1.2 P1.3 | length 5.1
  Top Layer w0.254: v1(11.303,93.638) M1.2
  Bottom Layer w0.254: P1.3@8.759,95.373 10.494,93.638 v1(11.303,93.638)
NetM1_3: M1.3 P1.2 | length 11.6
  Top Layer w0.254: v1(13.106,95.504) 14.305,94.305 14.305,93.346 14.097,93.138 M1.3
  Bottom Layer w0.254: P1.2@6.277,95.323 7.475,96.52 11.938,96.52 12.954,95.504 v1(13.106,95.504)
NetM1_75: M1.75 R3.2 | length 2.5
  Top Layer w0.254: M1.75 29.56,94.138 29.845,93.853 R3.2
NetM1_97: M1.97 R1.1 R2.2 | length 43.3
  Top Layer w0.254: M1.97 16.201,94.543 17.399,93.345 ; 17.398,93.345 v1(23.495,93.345) ; R1.1 R2.2 36.83,116.991 v1(36.83,107.696)
  Bottom Layer w0.254: v1(23.495,93.345) 29.591,93.345 36.83,100.584 v1(36.83,107.696)
NetP2_3: P2.3 U1.12 | length 14.5
  Top Layer w0.254: P2.3 6.721,43.05 v1(14.859,51.188)
  Bottom Layer w0.254: v1(14.859,51.188) U1.12@16.259,51.188
NetP2_4: P2.4 U1.14 | length 15.3
  Top Layer w0.254: P2.4 6.728,45.59 v1(14.859,53.721)
  Bottom Layer w0.254: v1(14.859,53.721) 17.013,53.721 U1.14
NetP3_1: P3.1 Q1.1 | length 3.1
  Top Layer w0.508: P3.1 33.721,92.141 34.296,92.716 Q1.1
NetP6_1: P6.1 R8.1 U4.8 | length 7.2
  Top Layer w0.254: R8.1 P6.1 14.732,106.184 15.736,107.188 U4.8
NetQ1_2: Q1.2 R3.1 | length 5
  Top Layer w0.254: R3.1 35.5,93.853 Q1.2
NetR7_2: R7.2 SEN1.22 U4.7 | length 10.8
  Top Layer w0.178: SEN1.22 9.614,109.417 10.446,108.585 18.161,108.585 18.694,108.052 U4.7
NetSEN2_4: SEN2.4 SEN2.5 U4.3 | length 12
  Top Layer w0.178: U4.3 21.285,105.715 21.717,105.283 23.368,105.283 25.573,107.488 SEN2.5 28.446,108.306 29.212,108.306 SEN2.4
RAD_RX: M1.13 U1.13 | length 41.3
  Top Layer w0.254: v1(11.557,87.63) 12.065,88.138 M1.13
  Bottom Layer w0.254: v1(11.557,87.63) 11.557,85.948 13.081,84.424 13.081,52.962 13.596,52.446 U1.13
RAD_TX: M1.12 U1.11 | length 45.7
  Top Layer w0.254: v1(10.73,88.638) M1.12
  Bottom Layer w0.254: v1(10.73,88.638) 10.73,85.683 12.319,84.094 12.319,53.213 12.319,51.339 13.751,49.906 U1.11
SCK: M1.20 P4.3 U4.13 | length 31.5
  Top Layer w0.254: M1.20 7.028,84.638 P4.3 8.201,87.477 8.201,91.767 15.494,99.06 19.442,99.06 20.65,100.268 U4.13
VBAT: C10.1 P5.2 R1.2 U2.1 | length 33.5
  Top Layer w0.254: R1.2 33.813,123.729 P5.2
  Top Layer w0.889: P5.2 34.544,124.222 37.608,121.158 39.497,121.158 51.339,109.316 U2.1
VREC: BAT2.1 pad.@35.687,31.496 pad.@35.687,34.29 | length 21
  Top Layer w0.889: BAT2.1 35.687,17.7 35.687,31.496 pad.@35.687,34.29
pads on no net: BAT1. BAT2. COMP1.2 COMP1.Mount COMP2.2 COMP2.Mount D1.3 GPS1.5 J1.DT J1.SW M1.1 M1.4 M1.5 M1.6 M1.7 M1.8 M1.9 M1.14 M1.15 M1.16 M1.17 M1.18 M1.19 M1.23 M1.24 M1.25 M1.26 M1.27 M1.28 M1.29 M1.35 M1.36 M1.37 M1.38 M1.39 M1.40 M1.41 M1.42 M1.43 M1.44 M1.46 M1.47 M1.48 M1.49 M1.50 M1.51 M1.52 M1.54 M1.55 M1.56 M1.57 M1.58 M1.59 M1.60 M1.65 M1.66 M1.67 M1.68 M1.69 M1.70 M1.71 M1.72 M1.73 M1.74 M1.79 M1.82 M1.83 M1.84 M1.85 M1.86 M1.87 M1.88 M1.89 M1.90 M1.91 M1.92 M1.93 M1.94 M1.95 M1.96 P2.5 P2.6 P4.2 SEN1.1 SEN1.2 SEN1.3 SEN1.4 SEN1.5 SEN1.6 SEN1.7 SEN1.8 SEN1.12 SEN1.14 SEN1.15 SEN1.16 SEN1.17 SEN1.19 SEN1.21 SEN1.25 U1.7 U1.9
copper on no net:
  other v2: 5.115,2.48 64.885,2.48 2.829,4.766 7.401,4.766 62.599,4.766 67.171,4.766 5.115,7.052 64.885,7.052 5.115,122.936 2.829,125.222 7.401,125.222 5.115,127.508

## Polygon pours and split planes (outlines as drawn)
GND on Bottom Layer "Bottom Layer-GND" (solid, pour order 4): 68.58,128.778 68.58,1.27 1.27,1.27 1.27,128.778
no net on Bottom Layer "Bottom Layer-No Net" (solid, pour order 2): 68.58,128.905
GND on Top Layer "Top Layer-GND" (solid, pour order 0): 38.1,128.778 38.1,94.488 68.58,94.488 68.58,128.778

## Silkscreen, mask and mechanical layers (free items; w line width, h text height)
Top Overlay:
  drawing of 14 lines, arcs and shapes, not listed

## Dimensions
26.008,59.944 to 26.008,14.274 on Top Overlay
9.398,59.944 to 26.008,59.944 on Top Overlay

## Text inside footprints (layer, text, board x,y; h text height)
P4: Top Overlay "6" at 4.163,89.535 h1.27 r90; Top Overlay "5" at 6.703,89.535 h1.27 r90; Top Overlay "2" at 4.163,80.391 h1.27 r90; Top Overlay "1" at 6.703,80.899 h1.27 r90
SEN1: Mechanical 13 "Z" at 7.029,109.892 h0.4 r270; Mechanical 13 "x" at 7.629,108.542 h0.4 r270; Mechanical 13 "Y" at 8.479,109.342 h0.4 r270